# EAGLE board 80 LED WS2812 panels (EAGLE 9.6.2)
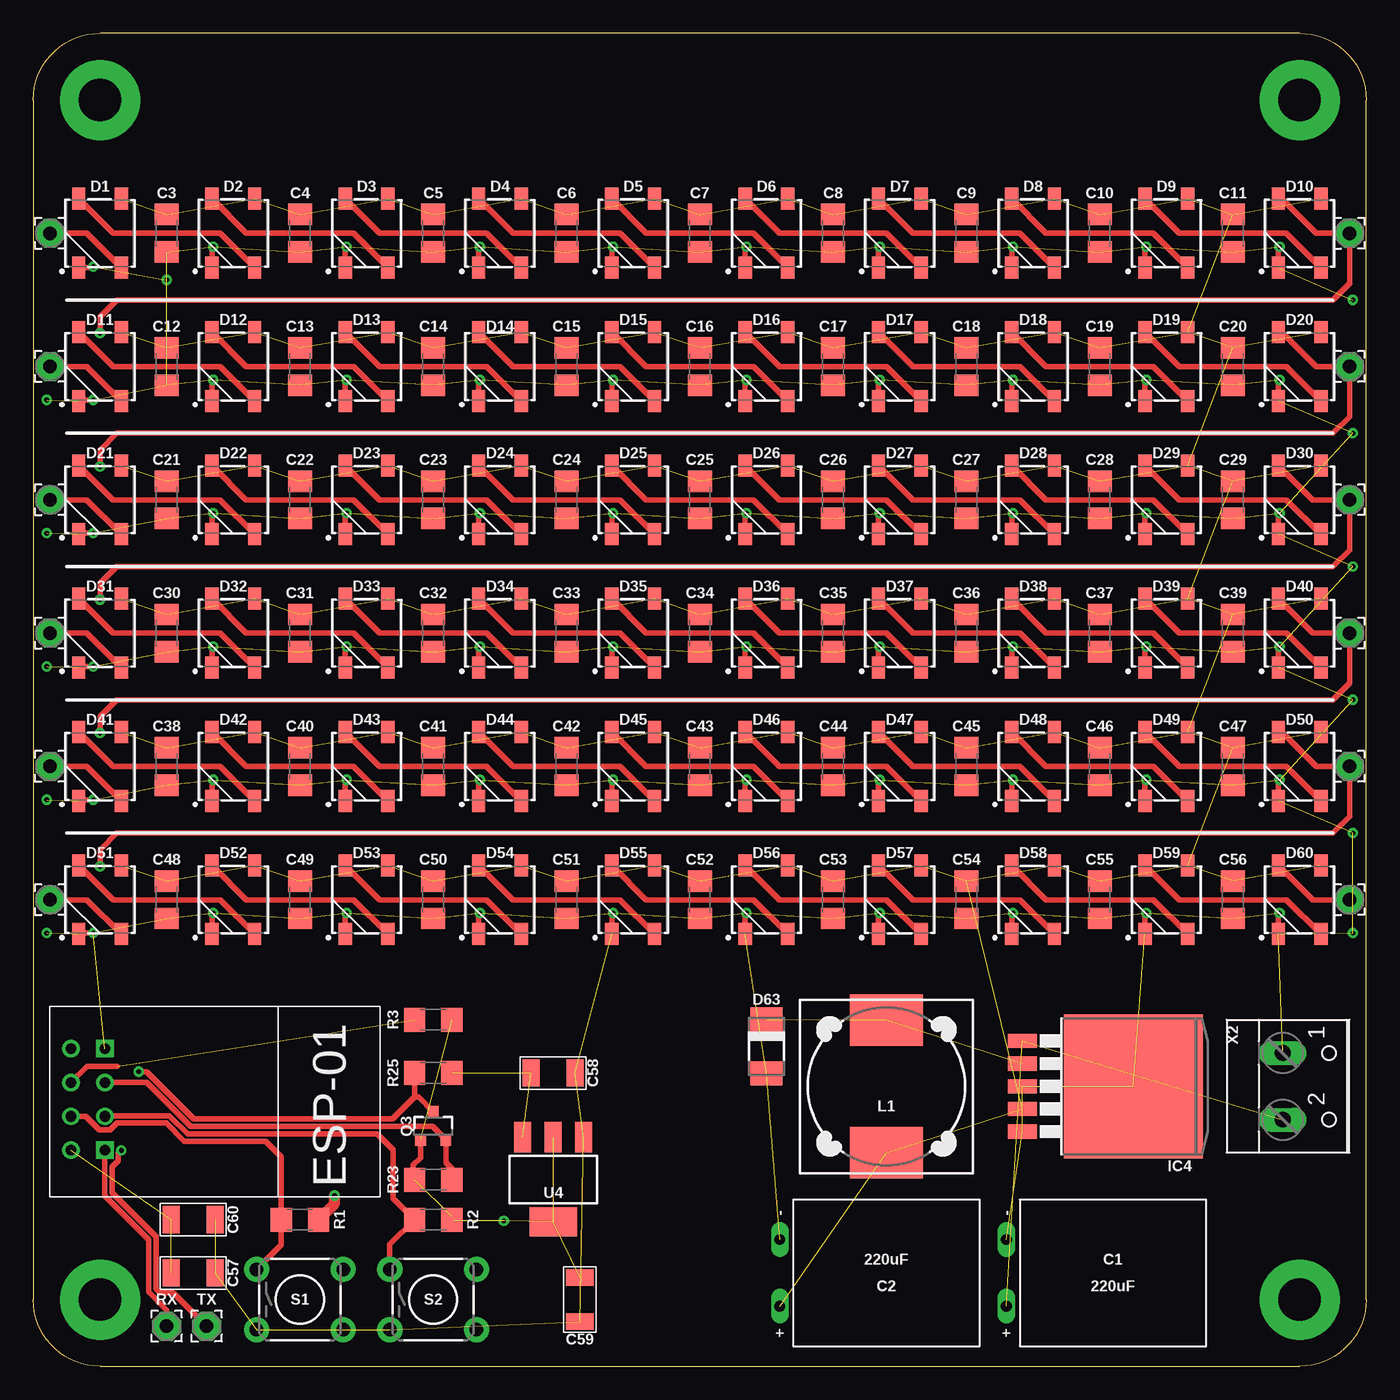
[diagram p0: board, top side]
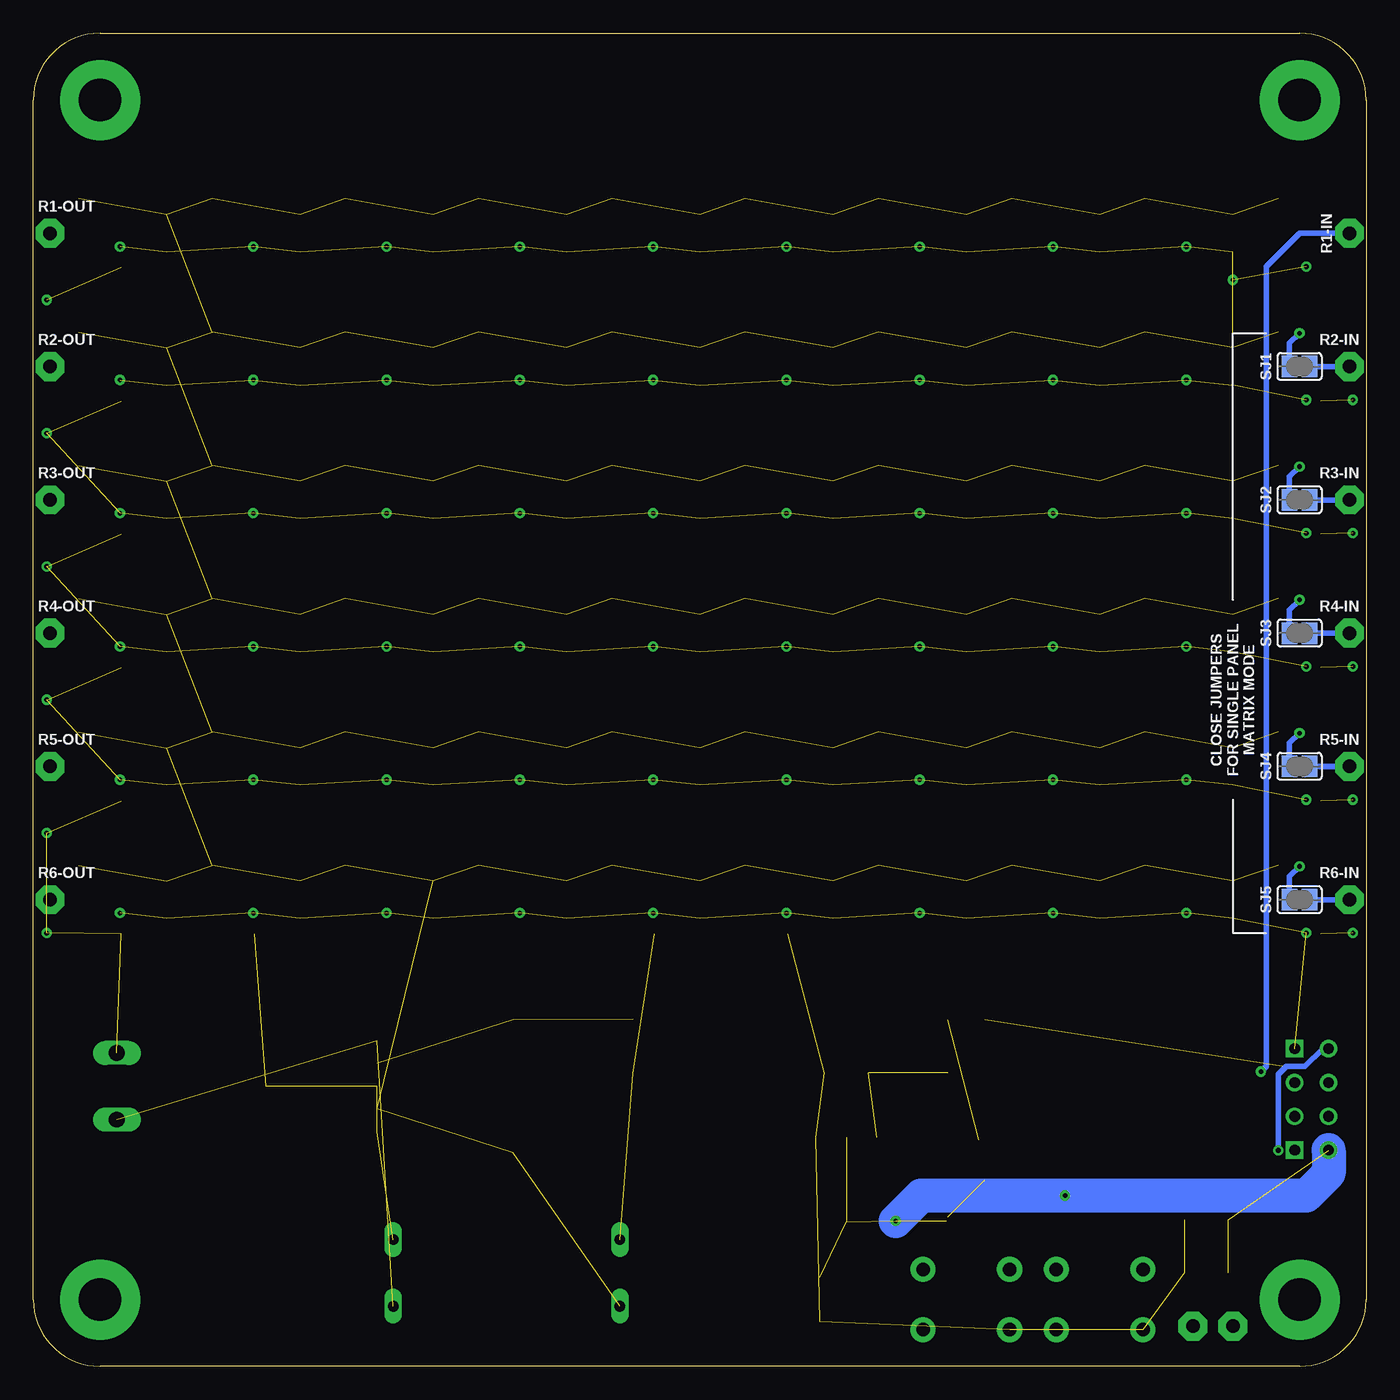
[diagram p1: board, bottom side, seen from below]

Size 100 x 100 mm. Coordinates in mm from the lower left corner, seen from the top.
Outline: 100,5 100,95 arc90 95,100 5,100 arc90 0,95 0,5 arc90 5,0 95,0 arc90 100,5
Copper layers (1*16): Top 0.035mm / dielectric 1.5mm / Bottom 0.035mm
Design rules "default": minimum track width 6mil, minimum drill 0.35mm, track to track 6mil, track to pad 6mil, pad to pad 6mil, via to via 6mil, smd to smd 6mil, copper to edge 40mil, drill to drill 6mil, minimum pad ring 10mil, minimum via ring 8mil, stop-mask expansion 4mil, vias tented up to drill 0mil, thermal gap 10mil
Net classes: 0 default: width 0.203 mm, clearance 0.152 mm

## Footprints (pad centres in the part's own frame; a part is rotated, then mirrored left to right if it is on the bottom)
CAPACITOR-SIDEWAY-CUTOUT = drill 0.8 long: + 2.5,-1; - -2.5,-1
C1206 = smd 1.6 x 1.8: 1 -1.4,0; 2 1.4,0
C1206' = smd 1.27 x 2.032: 1 -1.651,0; 2 1.651,0
DISCRETE_C1206 = smd 1.27 x 2.032: 1 -1.651,0; 2 1.651,0
WS2812B = smd 1.651 x 1: 1 2.577,-1.6; 2 2.577,1.6; 3 -2.577,1.6; 4 -2.577,-1.6
DO-214AC = smd 1.8 x 2.4: A 2.025,0; C -2.025,0
ESP01 = drill 0.8: CH_PD -1.285,-8.178; GPIO0 1.255,-5.638; GPIO2 -1.285,-5.638; RST 1.255,-8.178; TX -3.825,-8.178; VCC 3.795,-8.178 | drill 0.8 square: GND -3.825,-5.638; RX 3.795,-5.638
TO263-5 = smd 1.067 x 2.159: 1 -3.404,-5.791; 2 -1.702,-5.791; 3 0,-5.791; 4 1.702,-5.791; 5 3.404,-5.791 | smd 10.8 x 10.41: 6 0,2.54
DR127 = smd 3.85 x 5.5: 1 -4.975,0; 2 4.975,0
SOT23-3 = smd 0.8 x 0.9: 1 -0.95,-1; 2 0.95,-1; 3 0,1.1
1206 = smd 1.6 x 1.8: 1 -1.4,0; 2 1.4,0
2,15/1,0 = drill 1.016 pad 2.159 octagon: 1 0,0
TACTILE_SWITCH_PTH_6.0MM_KIT = drill 1.016 pad 1.88: 1 -3.251,2.261; 2 3.251,2.261; 3 -3.251,-2.261; 4 3.251,-2.261
SJ = smd 1.168 x 1.6: 1 -0.762,0; 2 0.762,0
SOT-223 = smd 1.27 x 2.286: 1 -2.286,-3.175; 2 0,-3.175; 3 2.286,-3.175 | smd 3.556 x 2.159: TER 0,3.175
W237-102 = drill 1.194 long: 1 -2.5,-1.27; 2 2.5,-1.27

## Placement (x,y rotation side)
C1  220uF  [CAPACITOR-SIDEWAY-CUTOUT]  74,7 270 top
C2  220uF  [CAPACITOR-SIDEWAY-CUTOUT]  57,7 270 top
C3  [C1206]  10,85 90 top
C4  [C1206]  20,85 270 top
C5  [C1206]  30,85 270 top
C6  [C1206]  40,85 270 top
C7  [C1206]  50,85 270 top
C8  [C1206]  60,85 270 top
C9  [C1206]  70,85 270 top
C10  [C1206]  80,85 270 top
C11  [C1206]  90,85 270 top
C12  [C1206]  10,75 270 top
C13  [C1206]  20,75 90 top
C14  [C1206]  30,75 270 top
C15  [C1206]  40,75 270 top
C16  [C1206]  50,75 270 top
C17  [C1206]  60,75 270 top
C18  [C1206]  70,75 270 top
C19  [C1206]  80,75 270 top
C20  [C1206]  90,75 270 top
C21  [C1206]  10,65 270 top
C22  [C1206]  20,65 270 top
C23  [C1206]  30,65 90 top
C24  [C1206]  40,65 270 top
C25  [C1206]  50,65 270 top
C26  [C1206]  60,65 270 top
C27  [C1206]  70,65 270 top
C28  [C1206]  80,65 270 top
C29  [C1206]  90,65 270 top
C30  [C1206]  10,55 270 top
C31  [C1206]  20,55 270 top
C32  [C1206]  30,55 270 top
C33  [C1206]  40,55 90 top
C34  [C1206]  50,55 270 top
C35  [C1206]  60,55 270 top
C36  [C1206]  70,55 270 top
C37  [C1206]  80,55 270 top
C38  [C1206]  10,45 270 top
C39  [C1206]  90,55 270 top
C40  [C1206]  20,45 270 top
C41  [C1206]  30,45 270 top
C42  [C1206]  40,45 270 top
C43  [C1206]  50,45 90 top
C44  [C1206]  60,45 270 top
C45  [C1206]  70,45 270 top
C46  [C1206]  80,45 270 top
C47  [C1206]  90,45 270 top
C48  [C1206]  10,35 270 top
C49  [C1206]  20,35 270 top
C50  [C1206]  30,35 270 top
C51  [C1206]  40,35 270 top
C52  [C1206]  50,35 270 top
C53  [C1206]  60,35 90 top
C54  [C1206]  70,35 270 top
C55  [C1206]  80,35 270 top
C56  [C1206]  90,35 270 top
C57  10uF  [C1206']  12,7 0 top
C58  10uF  [C1206']  39,22 0 top
C59  10uF  [C1206']  41,5 270 top
C60  0.1uF  [DISCRETE_C1206]  12,11 180 top
D1  WS2812B  [WS2812B]  5,85 90 top
D2  WS2812B  [WS2812B]  15,85 90 top
D3  WS2812B  [WS2812B]  25,85 90 top
D4  WS2812B  [WS2812B]  35,85 90 top
D5  WS2812B  [WS2812B]  45,85 90 top
D6  WS2812B  [WS2812B]  55,85 90 top
D7  WS2812B  [WS2812B]  65,85 90 top
D8  WS2812B  [WS2812B]  75,85 90 top
D9  WS2812B  [WS2812B]  85,85 90 top
D10  WS2812B  [WS2812B]  95,85 90 top
D11  WS2812B  [WS2812B]  5,75 90 top
D12  WS2812B  [WS2812B]  15,75 90 top
D13  WS2812B  [WS2812B]  25,75 90 top
D14  WS2812B  [WS2812B]  35,75 90 top
D15  WS2812B  [WS2812B]  45,75 90 top
D16  WS2812B  [WS2812B]  55,75 90 top
D17  WS2812B  [WS2812B]  65,75 90 top
D18  WS2812B  [WS2812B]  75,75 90 top
D19  WS2812B  [WS2812B]  85,75 90 top
D20  WS2812B  [WS2812B]  95,75 90 top
D21  WS2812B  [WS2812B]  5,65 90 top
D22  WS2812B  [WS2812B]  15,65 90 top
D23  WS2812B  [WS2812B]  25,65 90 top
D24  WS2812B  [WS2812B]  35,65 90 top
D25  WS2812B  [WS2812B]  45,65 90 top
D26  WS2812B  [WS2812B]  55,65 90 top
D27  WS2812B  [WS2812B]  65,65 90 top
D28  WS2812B  [WS2812B]  75,65 90 top
D29  WS2812B  [WS2812B]  85,65 90 top
D30  WS2812B  [WS2812B]  95,65 90 top
D31  WS2812B  [WS2812B]  5,55 90 top
D32  WS2812B  [WS2812B]  15,55 90 top
D33  WS2812B  [WS2812B]  25,55 90 top
D34  WS2812B  [WS2812B]  35,55 90 top
D35  WS2812B  [WS2812B]  45,55 90 top
D36  WS2812B  [WS2812B]  55,55 90 top
D37  WS2812B  [WS2812B]  65,55 90 top
D38  WS2812B  [WS2812B]  75,55 90 top
D39  WS2812B  [WS2812B]  85,55 90 top
D40  WS2812B  [WS2812B]  95,55 90 top
D41  WS2812B  [WS2812B]  5,45 90 top
D42  WS2812B  [WS2812B]  15,45 90 top
D43  WS2812B  [WS2812B]  25,45 90 top
D44  WS2812B  [WS2812B]  35,45 90 top
D45  WS2812B  [WS2812B]  45,45 90 top
D46  WS2812B  [WS2812B]  55,45 90 top
D47  WS2812B  [WS2812B]  65,45 90 top
D48  WS2812B  [WS2812B]  75,45 90 top
D49  WS2812B  [WS2812B]  85,45 90 top
D50  WS2812B  [WS2812B]  95,45 90 top
D51  WS2812B  [WS2812B]  5,35 90 top
D52  WS2812B  [WS2812B]  15,35 90 top
D53  WS2812B  [WS2812B]  25,35 90 top
D54  WS2812B  [WS2812B]  35,35 90 top
D55  WS2812B  [WS2812B]  45,35 90 top
D56  WS2812B  [WS2812B]  55,35 90 top
D57  WS2812B  [WS2812B]  65,35 90 top
D58  WS2812B  [WS2812B]  75,35 90 top
D59  WS2812B  [WS2812B]  85,35 90 top
D60  WS2812B  [WS2812B]  95,35 90 top
D63  SS34  [DO-214AC]  55,24 270 top
ESP  ESP01  [ESP01]  11,20 270 top
IC4  LM2596-5S  [TO263-5]  80,21 270 top
L1  33uH  [DR127]  64,21 270 top
Q3  BSS138  [SOT23-3]  30,18 0 top
R1  10k  [1206]  20,11 180 top
R1-IN  [2,15/1,0]  1.25,85 0 top
R1-OUT  [2,15/1,0]  98.75,85 0 top
R2  10k  [1206]  30,11 180 top
R2-IN  [2,15/1,0]  1.25,75 0 top
R2-OUT  [2,15/1,0]  98.75,75 0 top
R3  10k  [1206]  30,26 0 top
R3-IN  [2,15/1,0]  1.25,65 0 top
R3-OUT  [2,15/1,0]  98.75,65 0 top
R4-IN  [2,15/1,0]  1.25,55 0 top
R4-OUT  [2,15/1,0]  98.75,55 0 top
R5-IN  [2,15/1,0]  1.25,45 0 top
R5-OUT  [2,15/1,0]  98.75,45 0 top
R6-IN  [2,15/1,0]  1.25,35 0 top
R6-OUT  [2,15/1,0]  98.75,35 0 top
R23  10K  [1206]  30,14 0 top
R25  10K  [1206]  30,22 180 top
RX  [2,15/1,0]  10,3 0 top
S1  RST  [TACTILE_SWITCH_PTH_6.0MM_KIT]  20,5 0 top
S2  IO0  [TACTILE_SWITCH_PTH_6.0MM_KIT]  30,5 0 top
SJ1  [SJ]  5,75 180 bottom
SJ2  [SJ]  5,65 180 bottom
SJ3  [SJ]  5,55 180 bottom
SJ4  [SJ]  5,45 180 bottom
SJ5  [SJ]  5,35 180 bottom
TX  [2,15/1,0]  13,3 0 top
U4  1117/3.3v  [SOT-223]  39,14 180 top
X2  [W237-102]  95,21 270 top

## Library data of the parts
C1 C2 = cutout capacitor
C3-C56 = rcl; SPICEPREFIX: C
C57-C59 = discrete
C60 = A9G
D1-D60 = SparkFun-LED; PROD_ID: DIO-12503
D63 = diode
ESP = esp8266modules
IC4 = linear
L1 = inductors; SPICEPREFIX: L
Q3 R23 R25 = SparkFun
R1-R3 = SparkFun-Resistors; PROD_ID: RES-08705
R1-IN R1-OUT R2-IN R2-OUT R3-IN R3-OUT R4-IN R4-OUT R5-IN R5-OUT R6-IN R6-OUT RX TX = wirepad
S1 = SparkFun-Switches; PROD_ID: SWCH-08441; SF_SKU: COM-00097; SPICEPREFIX: B
S2 = SparkFun-Switches; PROD_ID: SWCH-08441; SF_SKU: COM-00097
SJ1-SJ5 = jumper
U4 = IC
X2 = con-wago-500; MPN: 237-102; OC_FARNELL: unknown; OC_NEWARK: 70K9898

## Nets
5V: C58.1 R25.1 U4.3
+3V3: C57.1 C59.1 C60.2 ESP.VCC Q3.1 R1.1 R2.1 R3.2 R23.1 U4.2 U4.TER
DIN1: D1.4 Q3.3 R1-IN.1 R25.2
DIN2: D11.4 R2-IN.1 SJ1.1
DIN3: D21.4 R3-IN.1 SJ2.1
DIN4: D31.4 R4-IN.1 SJ3.1
DIN5: D41.4 R5-IN.1 SJ4.1
DIN6: D51.4 R6-IN.1 SJ5.1
DOUT1: D10.2 R1-OUT.1 SJ1.2
DOUT2: D20.2 R2-OUT.1 SJ2.2
DOUT3: D30.2 R3-OUT.1 SJ3.2
DOUT4: D40.2 R4-OUT.1 SJ4.2
DOUT5: D50.2 R5-OUT.1 SJ5.2
DOUT6: D60.2 R6-OUT.1
GND: C1.- C2.- C3.1 C4.2 C5.2 C6.2 C7.2 C8.2 C9.2 C10.2 C11.2 C12.2 C13.1 C14.2 C15.2 C16.2 C17.2 C18.2 C19.2 C20.2 C21.2 C22.2 C23.1 C24.2 C25.2 C26.2 C27.2 C28.2 C29.2 C30.2 C31.2 C32.2 C33.1 C34.2 C35.2 C36.2 C37.2 C38.2 C39.2 C40.2 C41.2 C42.2 C43.1 C44.2 C45.2 C46.2 C47.2 C48.2 C49.2 C50.2 C51.2 C52.2 C53.1 C54.2 C55.2 C56.2 C57.2 C58.2 C59.2 C60.1 D1.3 D2.3 D3.3 D4.3 D5.3 D6.3 D7.3 D8.3 D9.3 D10.3 D11.3 D12.3 D13.3 D14.3 D15.3 D16.3 D17.3 D18.3 D19.3 D20.3 D21.3 D22.3 D23.3 D24.3 D25.3 D26.3 D27.3 D28.3 D29.3 D30.3 D31.3 D32.3 D33.3 D34.3 D35.3 D36.3 D37.3 D38.3 D39.3 D40.3 D41.3 D42.3 D43.3 D44.3 D45.3 D46.3 D47.3 D48.3 D49.3 D50.3 D51.3 D52.3 D53.3 D54.3 D55.3 D56.3 D57.3 D58.3 D59.3 D60.3 D63.A ESP.GND IC4.3 IC4.5 IC4.6 S1.3 S2.3 U4.1 X2.1
HI-V-IN: C1.+ IC4.1 X2.2
IO0: ESP.GPIO0 R2.2 S2.1
IO2: ESP.GPIO2 Q3.2 R23.2
LED1PWR: C2.+ C3.2 C4.1 C5.1 C6.1 C7.1 C8.1 C9.1 C10.1 C11.1 C12.1 C13.2 C14.1 C15.1 C16.1 C17.1 C18.1 C19.1 C20.1 C21.1 C22.1 C23.2 C24.1 C25.1 C26.1 C27.1 C28.1 C29.1 C30.1 C31.1 C32.1 C33.2 C34.1 C35.1 C36.1 C37.1 C38.1 C39.1 C40.1 C41.1 C42.1 C43.2 C44.1 C45.1 C46.1 C47.1 C48.1 C49.1 C50.1 C51.1 C52.1 C53.2 C54.1 C55.1 C56.1 D1.1 D2.1 D3.1 D4.1 D5.1 D6.1 D7.1 D8.1 D9.1 D10.1 D11.1 D12.1 D13.1 D14.1 D15.1 D16.1 D17.1 D18.1 D19.1 D20.1 D21.1 D22.1 D23.1 D24.1 D25.1 D26.1 D27.1 D28.1 D29.1 D30.1 D31.1 D32.1 D33.1 D34.1 D35.1 D36.1 D37.1 D38.1 D39.1 D40.1 D41.1 D42.1 D43.1 D44.1 D45.1 D46.1 D47.1 D48.1 D49.1 D50.1 D51.1 D52.1 D53.1 D54.1 D55.1 D56.1 D57.1 D58.1 D59.1 D60.1 IC4.4 L1.2
N$1: D19.2 D20.4
N$2: D18.2 D19.4
N$3: D17.2 D18.4
N$4: D16.2 D17.4
N$5: D15.2 D16.4
N$6: D14.2 D15.4
N$7: D13.2 D14.4
N$8: D12.2 D13.4
N$9: D11.2 D12.4
N$10: D29.2 D30.4
N$11: D9.2 D10.4
N$12: D8.2 D9.4
N$13: D7.2 D8.4
N$14: D6.2 D7.4
N$15: D5.2 D6.4
N$16: D4.2 D5.4
N$17: D3.2 D4.4
N$18: D2.2 D3.4
N$19: D1.2 D2.4
N$20: D28.2 D29.4
N$21: D27.2 D28.4
N$22: D26.2 D27.4
N$23: D25.2 D26.4
N$24: D24.2 D25.4
N$25: D23.2 D24.4
N$26: D22.2 D23.4
N$27: D21.2 D22.4
N$28: D39.2 D40.4
N$29: D38.2 D39.4
N$30: D37.2 D38.4
N$31: D36.2 D37.4
N$32: D35.2 D36.4
N$33: D34.2 D35.4
N$34: D33.2 D34.4
N$35: D32.2 D33.4
N$36: D31.2 D32.4
N$37: D49.2 D50.4
N$38: D48.2 D49.4
N$39: D47.2 D48.4
N$40: D46.2 D47.4
N$41: D45.2 D46.4
N$42: D44.2 D45.4
N$43: D43.2 D44.4
N$44: D42.2 D43.4
N$45: D41.2 D42.4
N$46: D59.2 D60.4
N$47: D58.2 D59.4
N$48: D57.2 D58.4
N$49: D56.2 D57.4
N$50: D55.2 D56.4
N$51: D54.2 D55.4
N$52: D53.2 D54.4
N$53: D52.2 D53.4
N$54: D51.2 D52.4
N$73: D63.C IC4.2 L1.1
PD: ESP.CH_PD R3.1
RST: ESP.RST R1.2 S1.1
RX: ESP.RX RX.1
TX: ESP.TX TX.1

## Tracks (layer width: path | path; a pad name or v marks a point on that pad's centre or on a via)
5V  (2 unrouted)
+3V3  (via drill 0.35)  (8 unrouted)
  Top 0.406: Q3.1 29.05,15.65 28.5,15.1 28.5,14.1 R23.1
  Top 0.813: 31.5,10.9 R2.1 31.4,11.2 | R1.1 22.6,12.2 v22.6,12.8
  Bottom 2.54: ESP.VCC 2.82,14.48 4.5,12.8 v22.6,12.8 33.4,12.8 v35.3,10.9
DIN1  (via drill 0.35)
  Top 0.406: D1.4 4.02,85 R1-IN.1 | R25.2 28.6,20.19 | v7.9,22.1 8.49,22.1 12.03,18.56 26.97,18.56 28.6,20.19 | Q3.3 28.91,20.19 28.6,20.19
  Bottom 0.406: R1-IN.1 5,85 7.5,82.5 7.5,22.5 v7.9,22.1
DIN2
  Top 0.406: D11.4 4.02,75 R2-IN.1
  Bottom 0.406: SJ1.1 R2-IN.1
DIN3
  Top 0.406: D21.4 4.02,65 R3-IN.1
  Bottom 0.406: SJ2.1 R3-IN.1 1.22,65
DIN4
  Top 0.406: D31.4 4.02,55 R4-IN.1
  Bottom 0.406: SJ3.1 R4-IN.1
DIN5
  Top 0.406: D41.4 4.02,45 R5-IN.1
  Bottom 0.406: SJ4.1 R5-IN.1
DIN6
  Top 0.406: D51.4 4.02,35 R6-IN.1
  Bottom 0.406: SJ5.1 R6-IN.1
DOUT1  (via drill 0.35)
  Top 0.406: D10.2 93.67,87.58 96.25,85 R1-OUT.1 98.75,81.25 97.5,80 6.25,80 5,78.75 v5,77.5
  Bottom 0.406: SJ1.2 5.76,76.74 v5,77.5
DOUT2  (via drill 0.35)
  Top 0.406: D20.2 93.67,77.58 96.25,75 R2-OUT.1 98.75,71.25 97.5,70 6.25,70 5,68.75 v5,67.5
  Bottom 0.406: SJ2.2 5.76,66.74 v5,67.5
DOUT3  (via drill 0.35)
  Top 0.406: D30.2 95.98,65 R3-OUT.1 98.75,61.25 97.5,60 6.25,60 5,58.75 v5,57.5
  Bottom 0.406: SJ3.2 5.76,56.74 v5,57.5
DOUT4  (via drill 0.35)
  Top 0.406: D40.2 95.98,55 R4-OUT.1 98.75,51.25 97.5,50 6.25,50 5,48.75 v5,47.5
  Bottom 0.406: SJ4.2 5.76,46.74 v5,47.5
DOUT5  (via drill 0.35)
  Top 0.406: D50.2 93.67,47.58 96.25,45 R5-OUT.1 98.75,41.25 97.5,40 6.25,40 5,38.75 v5,37.5
  Bottom 0.406: SJ5.2 5.76,36.74 v5,37.5
DOUT6
  Top 0.406: D60.2 95.98,35 R6-OUT.1
GND  (via drill 0.35)  (140 unrouted)
  Top 0.406: v4.5,82.5 4.42,82.42 D1.3 | D2.3 13.4,83.9 v13.5,84 | D3.3 23.4,83.9 v23.5,84 | D4.3 33.4,83.9 v33.5,84 | D5.3 43.4,83.9 v43.5,84 | D6.3 53.4,83.9 v53.5,84 | D7.3 63.4,83.9 v63.5,84 | D8.3 73.4,83.9 v73.5,84 | D9.3 83.4,83.9 v83.5,84 | D10.3 93.4,83.9 v93.5,84 | D20.3 93.4,73.9 v93.5,74 | D19.3 83.4,73.9 v83.5,74 | D18.3 73.4,73.9 v73.5,74 | D17.3 63.4,73.9 v63.5,74 | D16.3 53.4,73.9 v53.5,74 | D15.3 43.4,73.9 v43.5,74 | D14.3 33.4,73.9 v33.5,74 | D13.3 23.4,73.9 v23.5,74 | D12.3 13.4,73.9 v13.5,74 | D11.3 3.48,72.5 v4.5,72.5 | D21.3 3.48,62.5 v4.5,62.5 | D22.3 13.4,63.9 v13.5,64 | D23.3 23.4,63.9 v23.5,64 | D24.3 33.4,63.9 v33.5,64 | D25.3 43.4,63.9 v43.5,64 | D27.3 63.4,63.9 v63.5,64 | D26.3 53.4,63.9 v53.5,64 | D28.3 73.4,63.9 v73.5,64 | D29.3 83.4,63.9 v83.5,64 | D30.3 93.4,63.9 v93.5,64 | D40.3 93.4,53.9 v93.5,54 | D39.3 83.4,53.9 v83.5,54 | D38.3 73.4,53.9 v73.5,54 | D37.3 63.4,53.9 v63.5,54 | D36.3 53.4,53.9 v53.5,54 | D35.3 43.4,53.9 v43.5,54 | D34.3 33.4,53.9 v33.5,54 | D33.3 23.4,53.9 v23.5,54 | D32.3 13.4,53.9 v13.5,54 | D31.3 3.48,52.5 v4.5,52.5 | D41.3 3.48,42.5 v4.5,42.5 | D42.3 13.4,43.9 v13.5,44 | D43.3 23.4,43.9 v23.5,44 | D44.3 33.4,43.9 v33.5,44 | D45.3 43.4,43.9 v43.5,44 | D46.3 53.4,43.9 v53.5,44 | D47.3 63.4,43.9 v63.5,44 | D48.3 73.4,43.9 v73.5,44 | D49.3 83.4,43.9 v83.5,44 | D50.3 93.4,43.9 v93.5,44 | D51.3 3.48,32.5 v4.5,32.5 | D52.3 13.4,33.9 v13.5,34 | D53.3 23.4,33.9 v23.5,34 | D54.3 33.4,33.9 v33.5,34 | D55.3 43.4,33.9 v43.5,34 | D56.3 53.4,33.9 v53.5,34 | D57.3 63.4,33.9 v63.5,34 | D58.3 73.4,33.9 v73.5,34 | D59.3 83.4,33.9 v83.5,34 | D60.3 93.4,33.9 v93.5,34
  other vias: 10,81.5 1,72.5 1,62.5 1,52.5 1,42.5 1,32.5 99,80 99,70 99,60 99,50 99,40 99,32.5
HI-V-IN  (2 unrouted)
IO0
  Top 0.406: ESP.GPIO0 5.42,18.8 10.21,18.8 11.57,17.44 25.8,17.44 27,16.24 27,12.6 R2.2 26.75,9.15 S2.1
IO2
  Top 0.406: ESP.GPIO2 8.52,21.29 11.8,18 29.95,18 Q3.2 30.95,15.25 31.4,14.8 R23.2
LED1PWR  (116 unrouted)
N$1
  Top 0.406: D19.2 85.98,75 94.02,75 D20.4
N$2
  Top 0.406: D18.2 75.98,75 84.02,75 D19.4
N$3
  Top 0.406: D17.2 65.98,75 74.02,75 D18.4
N$4
  Top 0.406: D16.2 55.98,75 64.02,75 D17.4
N$5
  Top 0.406: D15.2 45.98,75 54.02,75 D16.4
N$6
  Top 0.406: D14.2 35.98,75 44.02,75 D15.4
N$7
  Top 0.406: D13.2 25.98,75 34.02,75 D14.4
N$8
  Top 0.406: D12.2 15.98,75 24.02,75 D13.4
N$9
  Top 0.406: D11.2 5.98,75 14.02,75 D12.4
N$10
  Top 0.406: D29.2 85.98,65 94.02,65 D30.4
N$11
  Top 0.406: D9.2 85.98,85 94.02,85 D10.4
N$12
  Top 0.406: D8.2 75.98,85 84.02,85 D9.4
N$13
  Top 0.406: D7.2 65.98,85 74.02,85 D8.4
N$14
  Top 0.406: D6.2 55.98,85 64.02,85 D7.4
N$15
  Top 0.406: D5.2 45.98,85 54.02,85 D6.4
N$16
  Top 0.406: D4.2 35.98,85 44.02,85 D5.4
N$17
  Top 0.406: D3.2 25.98,85 34.02,85 D4.4
N$18
  Top 0.406: D2.2 15.98,85 24.02,85 D3.4
N$19
  Top 0.406: D1.2 5.98,85 14.02,85 D2.4
N$20
  Top 0.406: D28.2 75.98,65 84.02,65 D29.4
N$21
  Top 0.406: D27.2 65.98,65 74.02,65 D28.4
N$22
  Top 0.406: D26.2 55.98,65 64.02,65 D27.4
N$23
  Top 0.406: D25.2 45.98,65 54.02,65 D26.4
N$24
  Top 0.406: D24.2 35.98,65 44.02,65 D25.4
N$25
  Top 0.406: D23.2 25.98,65 34.02,65 D24.4
N$26
  Top 0.406: D22.2 15.98,65 24.02,65 D23.4
N$27
  Top 0.406: D21.2 5.98,65 14.02,65 D22.4
N$28
  Top 0.406: D39.2 85.98,55 94.02,55 D40.4
N$29
  Top 0.406: D38.2 75.98,55 84.02,55 D39.4
N$30
  Top 0.406: D37.2 65.98,55 74.02,55 D38.4
N$31
  Top 0.406: D36.2 55.98,55 64.02,55 D37.4
N$32
  Top 0.406: D35.2 45.98,55 54.02,55 D36.4
N$33
  Top 0.406: D34.2 35.98,55 44.02,55 D35.4
N$34
  Top 0.406: D33.2 25.98,55 34.02,55 D34.4
N$35
  Top 0.406: D32.2 15.98,55 24.02,55 D33.4
N$36
  Top 0.406: D31.2 5.98,55 14.02,55 D32.4
N$37
  Top 0.406: D49.2 85.98,45 94.02,45 D50.4
N$38
  Top 0.406: D48.2 75.98,45 84.02,45 D49.4
N$39
  Top 0.406: D47.2 65.98,45 74.02,45 D48.4
N$40
  Top 0.406: D46.2 55.98,45 64.02,45 D47.4
N$41
  Top 0.406: D45.2 45.98,45 54.02,45 D46.4
N$42
  Top 0.406: D44.2 35.98,45 44.02,45 D45.4
N$43
  Top 0.406: D43.2 25.98,45 34.02,45 D44.4
N$44
  Top 0.406: D42.2 15.98,45 24.02,45 D43.4
N$45
  Top 0.406: D41.2 5.98,45 14.02,45 D42.4
N$46
  Top 0.406: D59.2 85.98,35 94.02,35 D60.4
N$47
  Top 0.406: D58.2 75.98,35 84.02,35 D59.4
N$48
  Top 0.406: D57.2 65.98,35 74.02,35 D58.4
N$49
  Top 0.406: D56.2 55.98,35 64.02,35 D57.4
N$50
  Top 0.406: D55.2 45.98,35 54.02,35 D56.4
N$51
  Top 0.406: D54.2 35.98,35 44.02,35 D55.4
N$52
  Top 0.406: D53.2 25.98,35 34.02,35 D54.4
N$53
  Top 0.406: D52.2 15.98,35 24.02,35 D53.4
N$54
  Top 0.406: D51.2 5.98,35 14.02,35 D52.4
N$55  (via drill 3.2 pad 6)
  other vias: 5,5
N$56  (via drill 3.2 pad 6)
  other vias: 95,5
N$57  (via drill 3.2 pad 6)
  other vias: 95,95
N$58  (via drill 3.2 pad 6)
  other vias: 5,95
N$73  (2 unrouted)
PD  (1 unrouted)
  Top 0.406: ESP.CH_PD 4.04,22.5 6.3,22.5
RST
  Top 0.406: ESP.RST 3.94,18.75 4.94,17.73 5.78,17.73 6.29,18.24 9.98,18.24 11.34,16.88 17.42,16.88 18.6,15.7 R1.2 18.6,9.11 S1.1
RX
  Top 0.406: RX.1 10,4.21 8.64,5.57 8.64,9.49 5.36,12.77 ESP.RX
TX  (via drill 0.35)
  Top 0.406: v6.6,16.2 6.37,15.97 6.37,15.4 5.92,14.95 5.92,13 9.2,9.72 9.2,5.8 9.5,5.5 10.5,5.5 TX.1
  Bottom 0.406: v6.6,16.2 6.6,21.9 6,22.5 4.6,22.5 3.27,23.82 ESP.TX

## Text on the board
bPlace: CLOSE JUMPERS / FOR SINGLE PANEL / MATRIX MODE